# Altium PCB PCB1.PcbDoc
Units mil, origin at the board's own origin, x right, y up, seen from the top; angles counter-clockwise.
Board outline 6000 x 4000 mil, 2 copper layers (Top Layer, Bottom Layer); 112 components, 87 nets, 366 pads, 32 vias.
Unrouted connection lines stored in the file: 131.
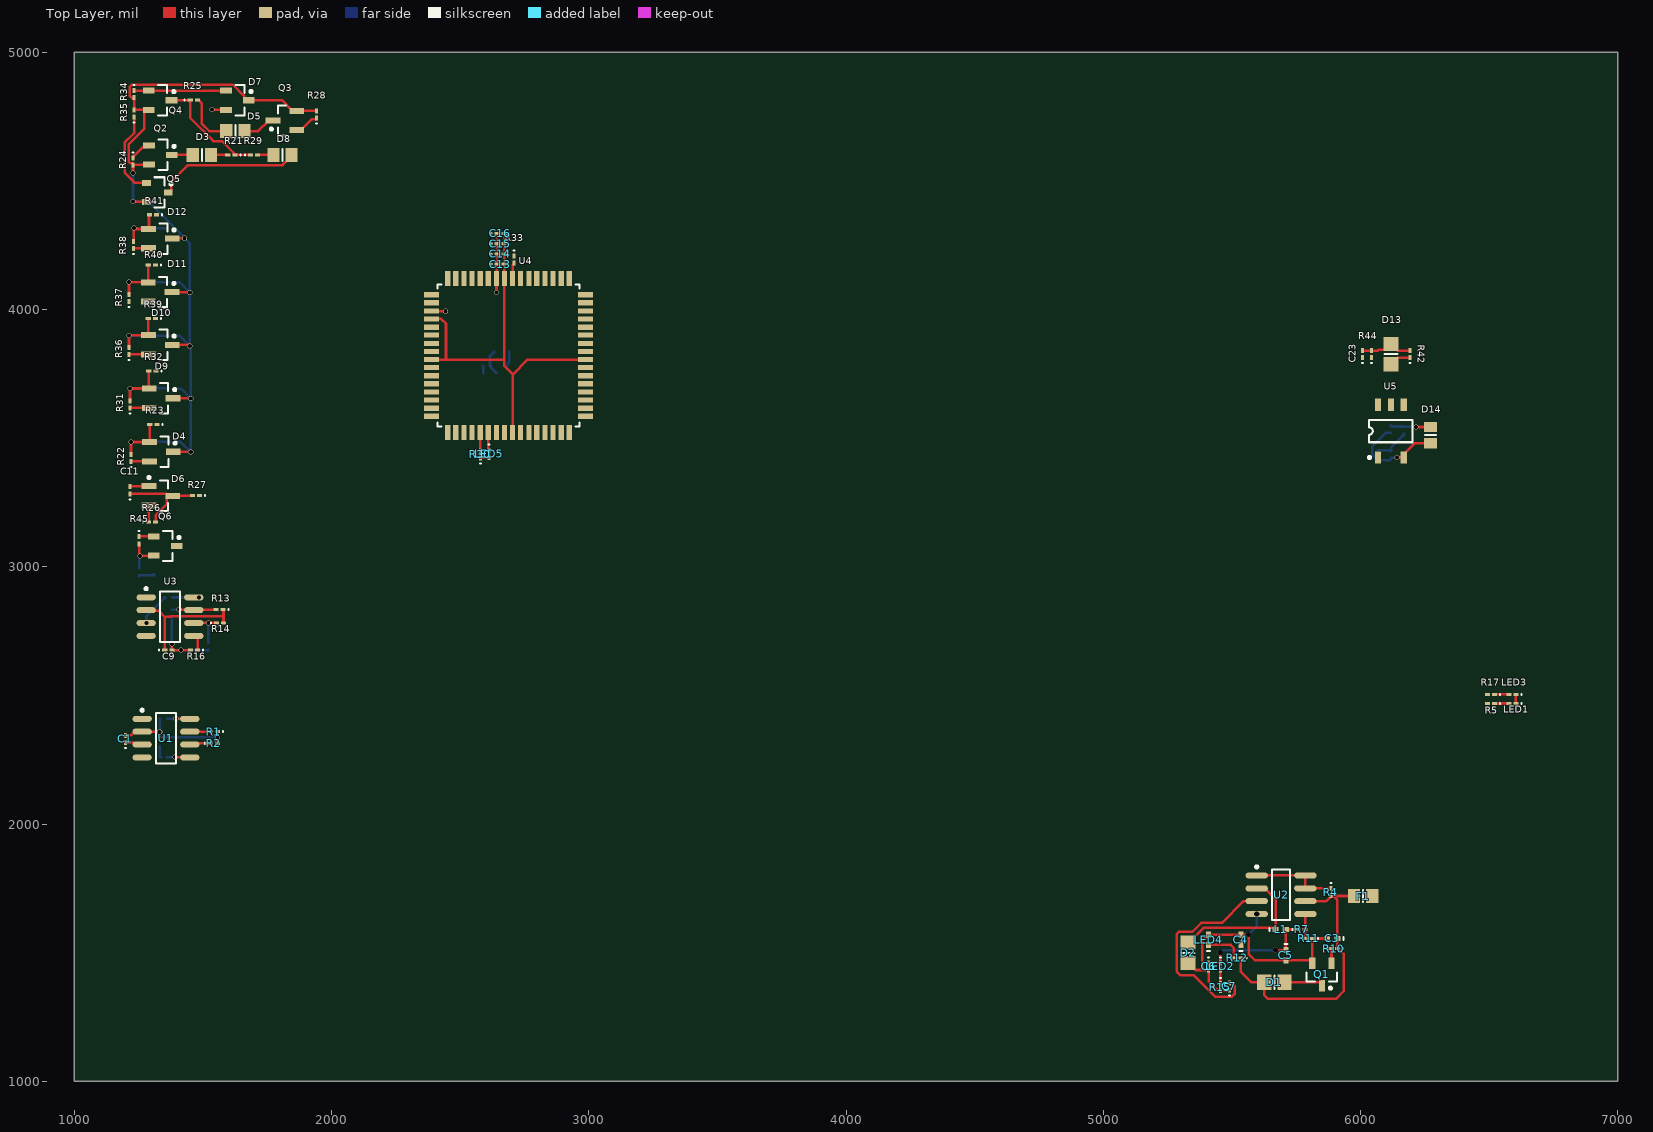
[diagram p0: Top Layer view]
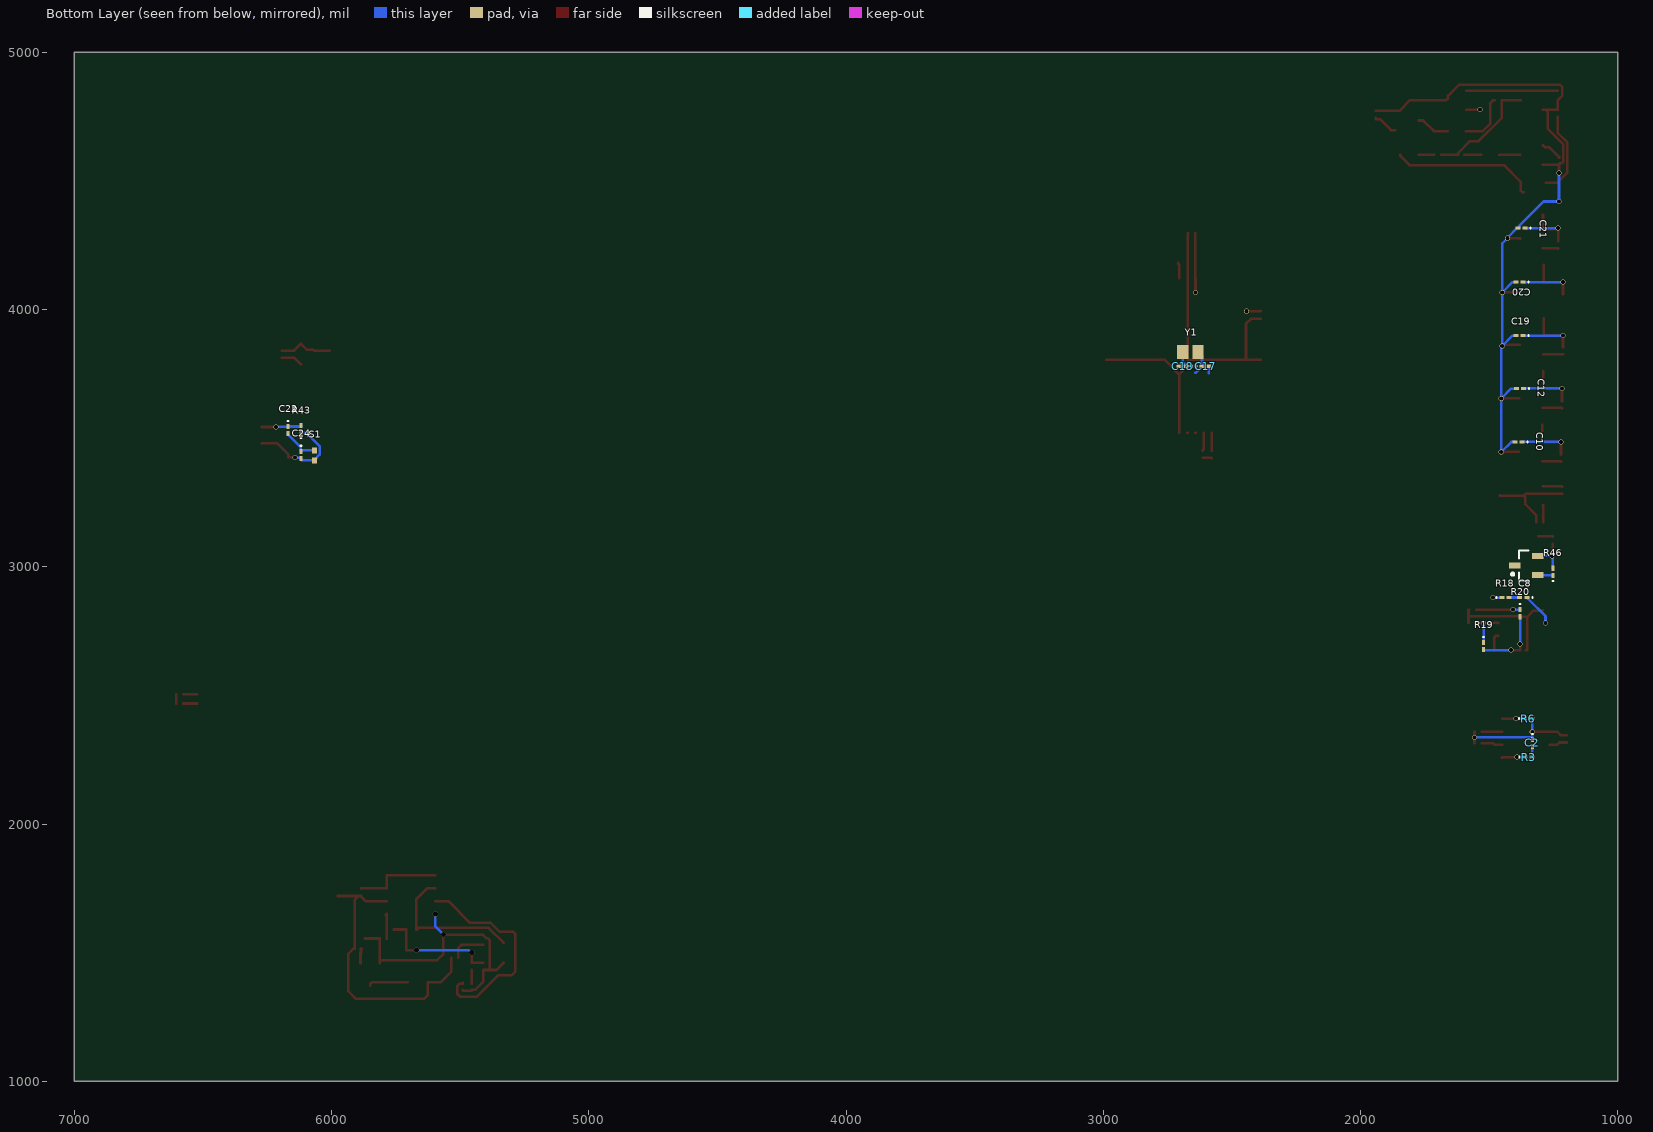
[diagram p1: Bottom Layer view, seen from below]

## Layer stack, top to bottom
Top Solder: solder mask 0.4, Solder Resist, Dk 3.5
Top Layer: signal copper 1.4
Dielectric 1: dielectric 12.6, FR-4, Dk 4.8
Bottom Layer: signal copper 1.4
Bottom Solder: solder mask 0.4, Solder Resist, Dk 3.5

## Board outline
1000,1000 7000,1000 7000,5000 1000,5000

## Design rules (kind name [scope] priority, off if disabled: settings)
Clearance [All] p1: gap=5.91 ignorepadtopadclearanceinfootprint=TRUE
PolygonConnect [All] p1: connectstyle=Relief reliefconductorwidth=10 reliefentries=4 polygonreliefangle="90 Angle" airgapwidth=10
RoutingVias [All] p1: holewidth=15.75 width=19.68 viastyle="Through Hole" minholewidth=7.87 minwidth=17.72 maxholewidth=39.37 maxwidth=50
SolderMaskExpansion [All] p1: expansion=4
Width [All] p1: maxlimit=10 minlimit=10 preferedwidth=10
30 further rules are at their usual default settings.

## Components (designator, comment, footprint, x,y, rotation, side; value= is the part's Value field where it differs from the comment)
C1 "100n" 0603 1198.8,2330.71 r90 top
C2 "4n7" 0603 1332.09,2314.96 r270 bottom value=100n
C3 "100n" 0402-A 5890.31,1555 r180 top
C4 "10u/16" 0402-A 5535,1549.68 r90 top value=470u/16
C5 "100u/6V3" 0402-A 5710,1490 r270 top value=470u/16
C6 "100n" 0603 5410,1446.22 r270 top
C7 "100p" 0603 5490,1368.78 r90 top value=100pF
C8 "100n" 0603 1367.21,2880.54 r0 bottom
C9 "4n7" 0603 1365.41,2675.65 r0 top value=100n
C10 "100n" 0603 1385.83,3485.59 r0 bottom
C11 "100n" 0603 1216.02,3297.46 r90 top
C12 "100n" 0603 1379.92,3693.43 r0 bottom
C13 "100n" 0603 2656.38,4176.16 r0 top
C14 "100n" 0603 2656.38,4215.97 r0 top
C15 "100n" 0603 2656.38,4255.78 r0 top
C16 "100n" 0603 2656.38,4295.59 r0 top
C17 "27p" 0603 2602.19,3779.53 r180 bottom value=100n
C18 "27p" 0603 2690.94,3779.53 r0 bottom value=100n
C19 "100n" 0603 1381.89,3898.33 r0 bottom
C20 "100n" 0603 1381.89,4106.3 r0 bottom
C21 "100n" 0603 1374.02,4316.41 r0 bottom
C22 "100n" 0603 6169.29,3531.5 r270 bottom
C23 "100n" 0603 6007.87,3826.77 r90 top
C24 "10n" 0603 6118.11,3435.04 r270 bottom value=100pF
D1 "P6SMB15A" 6-0805_M 5665,1385 r180 top
D2 "LL5817" 6-0805_M 5330,1499.37 r90 top
D3 "LL4148" 6-0805_N 1496.06,4601.06 r0 top
D4 "BAT54S" SOT23_M 1338.74,3447.2 r0 top
D5 "LL4148" 6-0805_N 1625.98,4693.42 r180 top
D6 "BAT54S" SOT-23B_M 1336.61,3275.78 r0 top
D7 "BAT54S" SOT23_N 1633.86,4813.66 r0 top
D8 "LL4148" 6-0805_N 1809.39,4601.06 r180 top
D9 "BAT54S" SOT23_M 1337.13,3655.05 r0 top
D10 "BAT54S" SOT23_M 1334.65,3862.89 r0 top
D11 "BAT54S" SOT23_M 1333.66,4067.95 r0 top
D12 "BAT54S" SOT23_M 1334.76,4275.76 r0 top
D13 "LL4148" 6-0805_M 6118.11,3826.77 r270 top
D14 "LL4448" 6-0805_L 6271.65,3511.81 r90 top
F1 "Fuse 1" 6-0805_N 6010.43,1720 r180 top
J1 "Header 7X2" HDR2X7 5962.2,6260.63 r90 top
J2 "Header 7X2" HDR2X7 3498.43,6265.87 r90 top
J3 "ZL201" HDR1X5 3228.43,6575.87 r90 top
J4 "MX-43045-0400" MHDR2X2 1218.43,6940.87 r0 top
J5 "MX-43045-0800" HDR2X4 2385.83,6126.77 r90 top
J6 "MX-43045-0600" HDR1X8 1917.32,5895.28 r90 top
J7 "MX-43045-0600" MHDR1X6 1254.8,6272.36 r90 top
L1 "DL22-330" 0402-A 5690,1590 r0 top value=100uH
LED1 "HCL-1904AYL" 0603 6590.55,2468.5 r180 top
LED2 "HCL-1903BG4" 0603 5455,1446.22 r270 top
LED3 "HCL-1906BR1" 0603 6590.55,2503.94 r180 top
LED4 "HCL-1904AYL" 0402-A 5410,1549.68 r90 top
LED5 "HCL-1906BR1" 0603 2612.37,3438.96 r270 top
Q1 "BSS138" SOT23_N 5850,1415 r270 top
Q2 "BSS123" SOT23_N 1334.65,4601.06 r0 top
Q3 "BSS123" SOT23_M 1819.07,4734.92 r180 top
Q4 "BSS123" SOT23_N 1333.66,4813.66 r0 top
Q5 "BSS123" SOT23_L 1322.83,4455.23 r0 top
Q6 "BSS123" SOT23_N 1353.54,3080.56 r0 top
Q7 "BSS123" SOT23_N 1355.31,3004.62 r0 bottom
R1 "CAN0001" 0603 1542.87,2358.98 r180 top
R2 "CAN0001" 0603 1542.87,2313.98 r0 top
R3 "nc" 0603 1345.87,2259.84 r180 bottom value=1K
R4 "1R" 0603 5885,1735 r270 top value=1K
R5 "4k7" 0603 6507.87,2468.5 r180 top value=1K
R6 "1k" 0603 1347.83,2409.45 r180 bottom value=1K
R7 "3k6 1%" 0603 5771.22,1590 r0 top value=1K
R8 "68" 0603 28890,1945 r0 top value=1K
R9 "68" 0603 29060,1945 r0 top value=1K
R10 "1M" 0603 5896.22,1515.56 r180 top value=1K
R11 "1k2 1%" 0603 5798.78,1555 r180 top value=1K
R12 "4k7" 0603 5521.22,1479.69 r180 top value=1K
R13 "CAN0001" 0603 1564.23,2833.13 r180 top
R14 "CAN0001" 0603 1566.2,2781.95 r0 top
R15 "1k8" 0603 5455,1366.22 r270 top value=1K
R16 "nc" 0603 1465.81,2675.65 r180 top value=1K
R17 "4k7" 0603 6507.87,2503.94 r180 top value=1K
R18 "1k" 0603 1436.28,2880.37 r180 bottom value=1K
R19 "68" 0603 1520.93,2691.4 r270 bottom value=1K
R20 "68" 0603 1379.19,2819.35 r270 bottom value=1K
R21 "10k" 0603 1610.24,4601.06 r180 top value=1K
R22 "10k" 0603 1220.47,3422.6 r90 top value=1K
R23 "1k" 0603 1307.09,3552.52 r180 top value=1K
R24 "4k7" 0603 1228.35,4575.47 r270 top value=1K
R25 "10k" 0603 1464.57,4813.66 r0 top value=1K
R26 "10k" 0603 1302.64,3173.25 r0 top value=1K
R27 "1k" 0603 1472.61,3277.78 r180 top value=1K
R28 "4k7" 0603 1940.94,4758.54 r90 top value=1K
R29 "10k" 0603 1698.99,4601.06 r0 top value=1K
R30 "1k8" 0603 2578.74,3437.01 r90 top value=1K
R31 "10k" 0603 1216.54,3630.44 r90 top value=1K
R32 "1k" 0603 1303.15,3760.36 r180 top value=1K
R33 "nc" 0603 2708.66,4194.88 r270 top value=1K
R34 "4k7" 0603 1232.28,4837.28 r270 top value=1K
R35 "4k7" 0603 1232.28,4762.48 r90 top value=1K
R36 "10k" 0603 1212.6,3839.27 r90 top value=1K
R37 "10k" 0603 1212.6,4045.28 r90 top value=1K
R38 "10k" 0603 1230.53,4251.17 r90 top value=1K
R39 "470" 0603 1301.18,3965.42 r180 top value=1K
R40 "1k" 0603 1301.18,4173.23 r180 top value=1K
R41 "1k" 0603 1305.81,4368.45 r180 top value=1K
R42 "4k7" 0603 6192.91,3826.77 r90 top value=1K
R43 "10k" 0603 6118.11,3535.43 r90 bottom value=1K
R44 "4k7" 0603 6043.31,3826.77 r90 top value=1K
R45 "4k7" 0603 1251.97,3103.04 r270 top value=1K
R46 "4k7" 0603 1252.42,2980.54 r90 bottom value=1K
S1 "DTSM32NB" 0402 6066.93,3433.07 r270 bottom
U1 "MCP2551-I/SN" SO8_L 1356.45,2333.85 r0 top
U2 "MC33063AD" SO8_N 5691.18,1725 r0 top
U3 "MCP2551-I/SN" SO8_L 1372.03,2806.24 r0 top
U4 "PIC30F5011" QFP80P1600X1600X120-64N 2687.99,3821.34 r270 top
U5 "MCP1320-46LT" SOP5(6) 6118.11,3527.33 r0 top
Y1 "10MHz" C0805 2661.42,3834.81 r180 bottom

## Footprints (in the part's own frame and the unit in brackets; to place one, negate y for a bottom-side part, rotate by r counter-clockwise, add the part's x,y. Pads: shape width x height; smd on the part's side, far side on the other; paste and mask are expansions set on the pad)
6-0805_L [mm] "Chip Resistor, Body 2.0x1.2mm, IPC High Density"
  rect 1x1.3 smd: 1(-0.8,0) 2(0.8,0)
  silkscreen extent 0,-0.55 0,0.55, body extent -1.07,-0.7 1.07,0.7, height 0.7
6-0805_M [mm] "Chip Resistor, Body 2.0x1.2mm, IPC Low Density"
  rect 1.4x1.5 smd: 1(-1,0) 2(1,0)
  silkscreen extent 0,-0.65 0,0.65, body extent -1.07,-0.7 1.07,0.7, height 0.7
6-0805_N [mm] "Chip Resistor, Body 2.0x1.2mm, IPC Medium Density"
  rect 1.2x1.4 smd: 1(-0.9,0) 2(0.9,0)
  silkscreen extent 0,-0.6 0,0.6, body extent -1.07,-0.7 1.07,0.7, height 0.7
0402 [mm] "Chip Capacitor, Body 1.0x0.5mm, IPC High Density"
  rect 0.6x0.5 smd: 1(-0.5,0) 2(0.5,0)
  body extent -0.55,-0.3 0.55,0.3, height 1.3
0402-A [mm] "Chip Inductor, Body 1.0x0.5mm, IPC High Density"
  rect 0.6x0.5 smd: 1(-0.5,0) 2(0.5,0)
  silkscreen extent -1.1,-0.15 -1.1,0.15, body extent -0.55,-0.3 0.55,0.3, height 0.55
0603 [mm] "Chip Inductor, Body 0.6x0.3mm, IPC High Density"
  rect 0.5x0.3 smd: 1(-0.35,0) 2(0.35,0)
  silkscreen extent -0.9,-0.05 -0.9,0.05, body extent -0.33,-0.18 0.33,0.18, height 0.55
C0805 [mm] "Chip Capacitor, Body 2.0x1.3mm, IPC High Density"
  rect 1.1x1.4 smd: 1(-0.75,0) 2(0.75,0)
  body extent -1.1,-0.72 1.1,0.72, height 1.4
HDR1X5 [mm] "Connector; Header; 5 Position"
  rect 1.5x1.5 hole 0.9: 1(0,0)
  round 1.5 hole 0.9: 2(2.54,0) 3(5.08,0) 4(7.62,0) 5(10.16,0)
  silkscreen extent -1.27,-1.27 11.43,1.27
HDR1X8 [mm] "Connector; Header; 8 Position"
  rect 1.5x1.5 hole 0.9: 1(0,0)
  round 1.5 hole 0.9: 2(2.54,0) 3(5.08,0) 4(7.62,0) 5(10.16,0) 6(12.7,0) 7(15.24,0) 8(17.78,0)
  silkscreen extent -1.27,-1.27 19.05,1.27
HDR2X4 [mm] "Connector; Header; 4x2 Position"
  rect 1.5x1.5 hole 0.9: 1(0,0)
  round 1.5 hole 0.9: 2(0,2.54) 3(2.54,0) 4(2.54,2.54) 5(5.08,0) 6(5.08,2.54) 7(7.62,0) 8(7.62,2.54)
  silkscreen extent -1.27,-1.27 8.89,3.81
HDR2X7 [mm] "Connector; Header; 7x2 Position"
  rect 1.5x1.5 hole 0.9: 1(0,0)
  round 1.5 hole 0.9: 2(0,2.54) 3(2.54,0) 4(2.54,2.54) 5(5.08,0) 6(5.08,2.54) 7(7.62,0) 8(7.62,2.54) 9(10.16,0) 10(10.16,2.54) 11(12.7,0) 12(12.7,2.54) 13(15.24,0) 14(15.24,2.54)
  silkscreen extent -1.27,-1.27 16.51,3.81
MHDR1X6 [mm] "Connector; Header; 6 Position"
  rect 1x1 hole 0.6: 1(0,0)
  round 1 hole 0.6: 2(1.27,0) 3(2.54,0) 4(3.81,0) 5(5.08,0) 6(6.35,0)
  silkscreen extent -0.9,-0.9 7.25,0.9
MHDR2X2 [mm] "Connector; Header; 2x2 Position"
  rect 1x1 hole 0.6: 1(0,0)
  round 1 hole 0.6: 2(0,1.27) 3(1.27,0) 4(1.27,1.27)
  silkscreen extent -0.9,-0.9 2.17,2.17
QFP80P1600X1600X120-64N [mil]
  rect 58x20 smd: 1(-300,236) 2(-300,205) 3(-300,173) 4(-300,142) 5(-300,110) 6(-300,79) 7(-300,47) 8(-300,16) 9(-300,-16) 10(-300,-47) 11(-300,-79) 12(-300,-110) 13(-300,-142) 14(-300,-173) 15(-300,-205) 16(-300,-236) 33(300,-236) 34(300,-205) 35(300,-173) 36(300,-142) 37(300,-110) 38(300,-79) 39(300,-47) 40(300,-16) 41(300,16) 42(300,47) 43(300,79) 44(300,110) 45(300,142) 46(300,173) 47(300,205) 48(300,236)
  rect 20x58 smd: 17(-236,-300) 18(-205,-300) 19(-173,-300) 20(-142,-300) 21(-110,-300) 22(-79,-300) 23(-47,-300) 24(-16,-300) 25(16,-300) 26(47,-300) 27(79,-300) 28(110,-300) 29(142,-300) 30(173,-300) 31(205,-300) 32(236,-300) 49(236,300) 50(205,300) 51(173,300) 52(142,300) 53(110,300) 54(79,300) 55(47,300) 56(16,300) 57(-16,300) 58(-47,300) 59(-79,300) 60(-110,300) 61(-142,300) 62(-173,300) 63(-205,300) 64(-236,300)
  silkscreen extent -276,-276 276,276
SO8_L [mm] "SOIC, 8-Leads, Body 4.9x3.9mm, Pitch 1.27mm, IPC High Density"
  oval 1.9x0.6 smd: 1(-2.35,1.905) 2(-2.35,0.635) 3(-2.35,-0.635) 4(-2.35,-1.905) 5(2.35,-1.905) 6(2.35,-0.635) 7(2.35,0.635) 8(2.35,1.905)
  silkscreen extent -2.47,-2.5 1,2.88, body extent -2,-2.5 2,2.5, height 1.75
SO8_N [mm] "SOIC, 8-Leads, Body 4.9x3.9mm, Pitch 1.27mm, IPC Medium Density"
  oval 2.2x0.6 smd: 1(-2.4,1.905) 2(-2.4,0.635) 3(-2.4,-0.635) 4(-2.4,-1.905) 5(2.4,-1.905) 6(2.4,-0.635) 7(2.4,0.635) 8(2.4,1.905)
  silkscreen extent -2.52,-2.5 0.9,2.88, body extent -2,-2.5 2,2.5, height 1.75
SOP5(6) [mm] "Small Outline; 6 Leads (1 Absent); Body Width 4.4 mm; Pitch 1.27 mm"
  rect 0.6x1.2 smd: 1(-1.27,-2.6) 3(1.27,-2.6) 4(1.27,2.6) 5(0,2.6) 6(-1.27,2.6)
  silkscreen extent -2.24,-2.72 2.15,1.1
SOT23_L [mm] "SOT23, 3-Leads, Body 2.9x1.3mm, Pitch 0.95mm, Lead Span 2.3mm - Reverse Pinning, IPC High Density"
  rect 0.85x0.6 smd: 1(1.075,0) 2(-1.075,-0.95) 3(-1.075,0.95)
  silkscreen extent -0.3,-1.5 1.48,1.5, body extent -0.7,-1.5 0.7,1.5, height 1.1
SOT23_M [mm] "SOT23, 3-Leads, Body 2.9x1.3mm, Pitch 0.95mm, Lead Span 2.3mm - Reverse Pinning, IPC Low Density"
  rect 1.45x0.6 smd: 1(1.175,0) 2(-1.175,-0.95) 3(-1.175,0.95)
  silkscreen extent -0.1,-1.5 1.48,1.5, body extent -0.7,-1.5 0.7,1.5, height 1.1
SOT23_N [mm] "SOT23, 3-Leads, Body 2.9x1.3mm, Pitch 0.95mm, Lead Span 2.3mm - Reverse Pinning, IPC Medium Density"
  rect 1.15x0.6 smd: 1(1.125,0) 2(-1.125,-0.95) 3(-1.125,0.95)
  silkscreen extent -0.2,-1.5 1.48,1.5, body extent -0.7,-1.5 0.7,1.5, height 1.1
SOT-23B_M [mm] "SOT23, 3-Leads, Body 2.9x1.3mm, Pitch 0.95mm, Lead Span 2.4mm, IPC Low Density"
  rect 1.45x0.6 smd: 1(-1.175,0.95) 2(-1.175,-0.95) 3(1.175,0)
  silkscreen extent -1.3,-1.5 0.7,1.92, body extent -0.7,-1.5 0.7,1.5, height 1.14

## Part data
C1 C2 C3 C6 C7 C8 C9 C10 C11 C12 C13 C14 C15 C16 C17 C18 C19 C20 C21 C22 C23 C24: library part Cap, "Capacitor", LatestRevisionDate=17-Jul-2002, LatestRevisionNote="Re-released for DXP Platform.", PackageReference=RAD-0.3, Published=8-Jun-2000, Publisher="Altium Limited"
C4 C5: library part "Cap Pol1", "Polarized Capacitor (Radial)", LatestRevisionDate=17-Jul-2002, LatestRevisionNote="Re-released for DXP Platform.", PackageReference=RB7.6-15, Published=8-Jun-2000, Publisher="Altium Limited"
D1: library part "D Zener", "Zener Diode", LatestRevisionDate=17-Jul-2002, LatestRevisionNote="Re-released for DXP Platform.", PackageReference=DIODE-0.7, Published=8-Jun-2000, Publisher="Altium Limited"
D2 D3 D5 D8 D13: library part 1N4148, "High Conductance Fast Diode", Code_JEDEC=DO-204-AH, ComponentLink1Description="Manufacturer Link", ComponentLink1URL=http://www.fairchildsemi.com/, ComponentLink2Description=Datasheet, ComponentLink2URL=http://www.fairchildsemi.com/ds/1N%2F1N4148.pdf, DatasheetDocument=1997, LatestRevisionDate=17-Jul-2002, LatestRevisionNote="Re-released for DXP Platform.", PackageReference=DO-35, Published=8-Jun-2000, Publisher="Altium Limited"
D4 D6 D7 D9 D10 D11 D12: "Schottky Barrier Double Diode", ComponentLink1Description="Manufacturer Link", ComponentLink1URL=http://www.semiconductors.philips.com/, ComponentLink2Description=Datasheet, ComponentLink2URL=http://www.semiconductors.philips.com/acrobat/datasheets/BAT54_SERIES_4.pdf, DatasheetVersion=4-Mar-2002, LatestRevisionDate=12-Dec-2006, LatestRevisionNote="IPC-7351 Footprint Added.", PackageDescription="3-Pin SOT-23 Package 0.95 mm Pitch, 2.3 mm Lead Span", PackageReference=SOT23, PackageVersion=May-1999, Published=17-Sep-2003, Publisher="Altium Limited"
D14: library part Diode, "Default Diode", PackageDocument=Sep-1996, Code_JEDEC=DO-214-AB, LatestRevisionDate=17-Jul-2002, LatestRevisionNote="Re-released for DXP Platform.", PackageReference=SMC, Published=8-Jun-2000, Publisher="Altium Limited"
F1: "Fuse", LatestRevisionDate=17-Jul-2002, LatestRevisionNote="Re-released for DXP Platform.", PackageReference=PIN-W2/E2.8, Published=8-Jun-2000, Publisher="Altium Limited"
J1 J2: "Header, 7-Pin, Dual row", LatestRevisionDate=17-Jul-2002, LatestRevisionNote="Re-released for DXP Platform.", Publisher="Altium Limited"
J3: library part CON5, "Connector"
J4: library part "Header 2X2", "Header, 2-Pin, Dual row", LatestRevisionDate=17-Jul-2002, LatestRevisionNote="Re-released for DXP Platform.", Publisher="Altium Limited"
J5: library part "Header 4X2A", "Header, 4-Pin, Dual row", LatestRevisionDate=17-Jul-2002, LatestRevisionNote="Re-released for DXP Platform.", Publisher="Altium Limited"
J6 J7: library part "Header 6", "Header, 6-Pin", LatestRevisionDate=17-Jul-2002, LatestRevisionNote="Re-released for DXP Platform.", Publisher="Altium Limited"
L1: library part "Inductor Iron", "Magnetic-Core Inductor", Published=24-Mar-1999, Publisher="Altium Limited", Revision="July-2002: Re-released for DXP Platform."
LED1 LED2 LED3 LED4 LED5: library part LED3, "Typical BLUE SiC LED", Published=8-Jun-2000, Publisher="Altium Limited", Revision 1="Jul-2002: Re-released for DXP Platform.", Revision 2="17-Dec-2003: PCB Footprint replaced."
Q1: "N-Channel Enhancement Mode Vertical DMOS FET", ComponentLink1Description="Manufacturer Link", ComponentLink1URL=http://www.zetex.com/, ComponentLink2Description=Datasheet, ComponentLink2URL=www.zetex.com/3.0/pdf/BSS138.pdf, DatasheetVersion=Mar-96, PackageDescription="SOT-23; 3 Leads; Body 3.1 x 2.5 mm, inc. leads (LxW max), Alternate Lead Configuration", PackageReference=SOT23, PackageVersion=1996, Published=17-Dec-2003, Publisher="Altium Limited"
Q2 Q3 Q4 Q5 Q6 Q7: "N-channel Enhancement Mode Vertical D-MOSFET", ComponentLink1Description="Manufacturer Link", ComponentLink1URL=http://www.semiconductors.philips.com/, ComponentLink2Description=Datasheet, ComponentLink2URL=http://www.semiconductors.philips.com/acrobat/datasheets/BSS123_3.pdf, DatasheetVersion=Apr-1995, LatestRevisionDate=12-Dec-2006, LatestRevisionNote="IPC-7351 Footprint Added.", PackageDescription="3-Pin SOT-23 Package 0.95 mm Pitch, 2.3 mm Lead Span", PackageReference=SOT23, PackageVersion=May-1999, Published=17-Sep-2003, Publisher="Altium Limited"
R1 R2 R13 R14: library part "Res Varistor", "Varistor (Voltage-Sensitive Resistor)", LatestRevisionDate=04-Mar-2005, LatestRevisionNote="PCB Footprint replaced.", PackageReference=6-0805, Published=24-Mar-1999, Publisher="Altium Limited"
R3 R4 R5 R6 R7 R8 R9 R10 R11 R12 R15 R16 R17 R18 R19 R20 R21 R22 R23 R24 R25 R26 R27 R28 R29 R30 R31 R32 R33 R34 R35 R36 R37 R38 R39 R40 R41 R42 R43 R44 R45 R46: library part Res2, "Resistor", LatestRevisionDate=17-Jul-2002, LatestRevisionNote="Re-released for DXP Platform.", PackageReference=AXIAL-0.4, Published=8-Jun-2000, Publisher="Altium Limited"
S1: library part PUSHB, "Switch PushButton"
U1 U3: "High Speed CAN Transceiver, 8-Pin Plastic SOIC, Industrial Grade", Code_JEDEC=MS-012, ComponentLink1Description="Manufacturer Link", ComponentLink1URL=http://www.microchip.com, ComponentLink2Description=Datasheet, ComponentLink2URL=http://ww1.microchip.com/downloads/en/DeviceDoc/21667d.pdf, DatasheetVersion=Nov-2003, LatestRevisionDate=13-Apr-2006, LatestRevisionNote="IPC-7351 Footprint Added.", PackageDescription="8-Pin Plastic Narrow Body Small Outline Integrated Circuit 1.27 mm Pitch", PackageReference=SOIC150-8, PackageVersion=Oct-2005, Published=6-Oct-2005, Publisher="Altium Limited"
U2: "DC-to-DC Converter Control Circuit", Code_IPC=SOIC127P600-8, Code_JEDEC=MS-012-AA, ComponentLink1Description="Manufacturer Link", ComponentLink1URL=http://www.onsemi.com/site/products/taxonomy/0,4438,503,00.html, ComponentLink2Description=Datasheet, ComponentLink2URL=http://www.onsemi.com/pub/Collateral/MC34063A-D.PDF, DatasheetVersion=1988, LatestRevisionDate=13-Apr-2006, LatestRevisionNote="IPC-7351 Footprint Added.", PackageDescription="8-Pin Small Outline Integrated Circuit 1.27 mm Pitch", PackageReference=751-02, Published=17-Jul-2002, Publisher="Altium Limited"
U4: "PIC30F5011 - Up"
U5: library part MCP1320
Y1: library part XTAL, "Crystal Oscillator", LatestRevisionDate=17-Jul-2002, LatestRevisionNote="Re-released for DXP Platform.", PackageReference=R38, Published=8-Jun-2000, Publisher="Altium Limited"

## Via types
v1: diameter 19.68, hole 15.75, Top Layer to Bottom Layer, 28 vias
v2: diameter 19.68, hole 19.68, Top Layer to Bottom Layer, 4 vias

## Nets (pads, with @x,y where several pads share a name; then routed paths per layer and width w, separated by ;. In a path a pad name is that pad's centre, name@x,y a point inside that pad or via, vN(x,y) a via of type N, cw(c..) or ccw(c..) an arc to the next point about the centre after c; other vN are vias at no path point)
+5V: C1.1 C5.1 C6.1 C8.1 C13.1 C14.1 C15.1 C16.1 C22.1 D4.2 D6.2 D7.2 D9.2 D10.2 D11.2 D12.2 D13.2 D14.2 J1.2 J2.2 J2.4 J2.6 J3.2 J4.2 L1.2 LED1.1 LED2.1 LED3.1 LED5.1 R7.1 R22.1 R26.1 R31.1 R36.1 R37.1 R38.1 R42.1 R43.2 U1.3 U3.3 U4.10 U4.19 U4.26 U4.38 U4.57 U5.5 | length 1752
  Top Layer w10: C1.1 1226.57,2316.93 1234.65,2308.85 U1.3 ; R36.1 D10.2 ; R31.1 R31.1 1217.44,3617.65 D9.2 ; R22.1 1220.47,3408.9 1221.38,3409.8 D4.2 ; R38.1 1231.01,4237.87 1289.99,4237.87 D12.2@1290.47,4238.36 ; R26.1 1288.86,3236.88 D6.2 ; v1(1535.43,4778.23) 1536.42,4777.24 1588.58,4777.24 D7.2 ; U4.19 2389.1,3993.23 v1(2443.78,3993.23) ; U4.38 2608.99,3458.1 2612.37,3454.72 LED5.1@2612.37,3450.79 ; v1(2641.73,4066.93) 2641.36,4067.3 2641.36,4120.97 U4.10 2641.8,4122.14 2641.8,4175.36 C13.1 C14.1 C15.1 C16.1 ; C6.1 LED2.1 v2(5455,1500) ; C5.1 5709.84,1509.84 5670.16,1509.84 v2(5670,1510) 5709.84,1510 5709.84,1589.84 L1.2 R7.1 ; D13.2 6120.08,3787.4 6145.67,3812.99 R42.1 ; v1(6216.54,3543.31) D14.2 ; LED1.1 LED3.1
  Bottom Layer w10: v1(1280.77,2781.95) 1280.77,2807.87 1348.59,2875.7 1348.59,2879.64 1349.5,2880.54 C8.1 ; v2(5455,1500) 5457.62,1500 5467.62,1510 v2(5670,1510) ; R43.2 6118.11,3546.18 6119.02,3545.28 C22.1 6169.29,3545.2 6170.2,3544.29 6215.55,3544.29 v1(6216.54,3543.31)
+12V: C3.1 C4.1 D1.2 F1.2 J5.5 R4.2 R10.1 R12.1 U2.6 | length 1125.6
  Top Layer w10: R12.1 5535,1425 5575,1385 D1.2 5625.63,1335.63 5641.26,1320 5905,1320 5935,1350 5935,1494.5 5913.94,1515.56 R10.1 C3.1 5910,1705 5895,1720 ; U2.6 5867.72,1700 R4.2@5885,1717.28 ; R4.2 5885,1720.91 5885.91,1720 5895,1720 ; F1.2 5895,1720
+12VPWR: F1.1 J6.3 J7.3
ADC0: J1.4 U4.16
ADC1: J1.6 U4.15
ADC2: J1.8 U4.14
ADC3: J1.10 U4.13
ADC4: J1.12 U4.12
ButD: C10.1 D4.3 R22.2 R23.2 U4.23 | length 341.5
  Top Layer w10: R22.2 v1(1220.47,3485.59) 1220.96,3485.1 1291.99,3485.1 D4.3 1293.31,3485.43 R23.2
  Bottom Layer w10: v1(1220.47,3485.59) C10.1
ButD_IN: J5.2 R23.1
ButN: C11.1 D6.3 R26.2 R27.2 U4.22 | length 370
  Top Layer w10: C11.1 1358.23,3283.68 D6.3@1366.14,3275.78 ; R26.2 1316.42,3200.1 1359.33,3243.02 1359.33,3268.97 D6.3@1366.14,3275.78 ; R27.2 1457.92,3276.87 1383.97,3276.87 D6.3 D6.3@1366.14,3275.78
ButN_IN: J5.3 R27.1
ButR: C12.1 D9.3 R31.2 R32.2 U4.21 | length 341.4
  Top Layer w10: R31.2 v1(1216.54,3693.43) 1217.03,3692.94 D9.3@1290.37,3692.94 ; R32.2 1289.37,3693.95 D9.3@1290.37,3692.94 ; D9.3 D9.3@1290.37,3692.94
  Bottom Layer w10: v1(1216.54,3693.43) C12.1
ButR_IN: J5.4 R32.1
CAN_BMS_RX: U4.58
CAN_BMS_TX: R17.2 U3.1 U4.59
CAN_BMSS_H: J7.1 R13.2 R20.1 U3.7 | length 172
  Top Layer w10: v1(1406.75,2833.13) 1407.7,2832.18 1465.49,2832.18 1465.53,2832.22 1549.55,2832.22 R13.2
  Bottom Layer w10: R20.1 v1(1406.75,2833.13)
CAN_BMSS_L: J7.2 R14.1 R19.1 U3.6 | length 164.9
  Top Layer w10: U3.6 1464.9,2781.59 1552.07,2781.59 R14.1
  Bottom Layer w10: R19.1 v1(1520.93,2781.95)
CAN_MUX_RX: U4.61
CAN_MUX_TX: R5.2 U1.1 U4.60
CAN_MUXED_H: J6.1 R1.2 R9.1 U1.7 | length 80.2
  Top Layer w10: U1.7 1449.03,2358.91 1529.03,2358.91 R1.2
CAN_MUXED_L: J6.2 R2.1 R8.1 U1.6 | length 82.3
  Top Layer w10: U1.6 1478.24,2308.85 1483.37,2313.98 R2.1
ChrgLED: Q6.3 R45.1 U4.29 | length 57.9
  Top Layer w10: R45.1 1251.97,3117.06 1252.87,3117.96 Q6.3
ChrgLED_OUT: J7.6 Q6.1
FluidHeater: Q7.3 R46.1 U4.30 | length 70
  Bottom Layer w10: R46.1@1251.97,2965.25 1251.97,2966.31 R46.1 ; R46.1@1252.42,2962.82 R46.1 ; Q7.3@1307.09,2971.15 Q7.3 1252.87,2967.21 R46.1
FluidHeater_OUT: J6.6 Q7.1
GND: C1.2 C2.1 C3.2 C4.2 C5.2 C6.2 C7.1 C8.2 C9.1 C10.2 C11.2 C12.2 C13.2 C14.2 C15.2 C16.2 C17.2 C18.2 C19.2 C20.2 C21.2 C22.2 C23.1 C24.1 D2.1 D4.1 D6.1 D7.1 D9.1 D10.1 D11.1 D12.1 J1.14 J2.12 J2.14 J3.3 J4.1 J5.1 LED4.2 Q1.2 Q2.2 Q3.2 Q4.2 Q5.2 Q6.2 Q7.2 R1.1 R2.2 R6.2 R11.1 R13.1 R14.2 R15.2 R18.2 R24.2 R28.2 R34.2 R35.2 R45.2 R46.2 S1.1 U1.2 U2.4 U3.2 U4.9 U4.20 U4.25 U4.41 U4.56 | length 7350.3
  Top Layer w10: C1.2@1198.19,2345.1 C1.2 1220.29,2344.49 1234.36,2358.56 1331.8,2358.56 v1(1332.09,2358.27) ; C11.2 1216.02,3311.31 1216.93,3312.21 1289.39,3312.21 D6.1 ; v1(1228.35,4419.96) 1229.41,4418.89 1279.44,4418.89 Q5.2 ; v1(1228.35,4530.2) R24.2 R24.2@1228.35,4562.76 ; R45.2 1251.97,3048.57 1255.91,3044.64 v1(1255.91,3042.02) 1256.48,3042.59 1308.68,3042.59 Q6.2 ; Q2.2 1229.25,4563.66 R24.2@1228.35,4562.76 ; Q4.2@1290.35,4776.26 Q4.2 Q4.2@1278.54,4776.26 ; U3.2@1292.3,2831.24 1294.35,2829.19 1328.01,2829.19 1351.63,2805.57 ; C9.1@1356.48,2674.74 1355.57,2675.65 C9.1 1351.63,2805.57 ; D12.1@1379.05,4275.76 1379.69,4276.4 1428.49,4276.4 v1(1429.13,4277.04) ; D11.1 1380.43,4067.44 1448.31,4067.44 v1(1448.82,4066.93) ; D10.1 v1@1448.82,3862.89 ; D9.1 1383.88,3654.56 1452.26,3654.56 v1(1452.76,3654.06) ; D4.1 1385.49,3446.71 1452.26,3446.71 v1(1452.76,3446.22) ; R2.2 v1(1556.65,2336.48) R1.1 ; R13.1 1579.07,2833.13 1579.98,2832.22 1579.98,2807.09 ; R14.2 1579.98,2807.09 ; R28.2 Q3.2 1848.59,4772.32 1807.25,4813.66 D7.1 1667.32,4813.66 1660.51,4820.47 1660.51,4829.99 1616.72,4873.78 1223.83,4873.78 1215.47,4865.42 1215.47,4831.22 1232.28,4814.4 R35.2 Q4.2@1278.54,4776.26 ; U4.25 2444.88,3805.34 ; U4.20 2426.43,3963.34 2444.88,3944.88 2444.88,3805.34 ; C16.2 2671.09,4295.59 2671.99,4294.69 U4.9 2671.99,3807.09 ; U4.41 2704.36,3521.7 2704.36,3570.5 2704.72,3570.87 2704.72,3748.03 ; U4.56 2762.03,3805.34 2704.72,3748.03 ; D2.1 5331.97,1460 5359.53,1432.44 5384.76,1432.44 ; C7.1 5490,1353.35 5489.09,1352.44 R15.2 5455,1354.41 5454.09,1355.32 5442.95,1355.32 5410,1388.26 C6.2 5384.76,1432.44 ; R11.1 C3.2 ; Q1.2 Q1.2@5812.58,1463.52 ; R11.1 Q1.2@5812.58,1463.52 ; R24.2@1228.35,4562.76 1228.35,4565.63 1225.47,4568.5 1217.92,4568.5 1211.54,4574.89 1211.54,4642.07 1271.73,4702.27 1271.73,4769.45 Q4.2@1278.54,4776.26 ; 1351.63,2805.57 1372.5,2805.57 1374.02,2807.09 1579.98,2807.09 ; 2444.88,3805.34 2670.24,3805.34 2671.99,3807.09 ; 2671.99,3807.09 2671.99,3780.76 2704.72,3748.03 ; 5384.76,1432.44 5384.76,1547.41 5394.01,1556.65 5399.25,1556.65 5410,1567.4 LED4.2 C4.2 5535.31,1569.69 5564.69,1569.69 v2(5565,1570) 5565,1495 5589.69,1470.31 C5.2 5805.79,1470.31 Q1.2@5812.58,1463.52
  Bottom Layer w10: v1(1228.35,4530.2) v1(1228.35,4419.96) 1287.85,4419.96 1382.95,4324.86 1382.95,4317.31 1383.86,4316.41 C21.2 1391.73,4316.41 1429.13,4279.01 v1(1429.13,4277.04) 1448.82,4257.35 v1(1448.82,4066.93) ; R46.2 1252.42,3035.91 1255.91,3039.4 v1(1255.91,3042.02) Q7.2 1304.21,3035.21 Q7.2@1293.31,3035.21 ; R6.2 1332.99,2409.45 1332.09,2408.54 v1(1332.09,2358.27) 1332.09,2337.91 1333.51,2336.48 v1(1556.65,2336.48) ; C8.2 1381.08,2880.46 1422.42,2880.46 R18.2 ; C12.2 1394.61,3692.53 1414.29,3692.53 v1(1452.76,3654.06) ; C19.2 1409.45,3898.33 v1(1448.82,3858.96) ; C20.2 1396.57,4105.39 1410.35,4105.39 v1(1448.82,4066.93) ; C10.2 1413.39,3485.59 v1(1452.76,3446.22) v1(1452.76,3654.06) ; C17.2 2588.58,3779.53 2589.48,3778.62 2589.48,3753.04 ; v2(5565,1570) 5596.69,1601.69 v2(5596.69,1650) ; S1.1 6117.2,3452.76 6118.11,3451.85 C24.1 6119.02,3449.72 6119.02,3463.5 6169.29,3513.78 C22.2 ; v1(1448.82,3858.96) v1(1448.82,4066.93) ; v1(1448.82,3858.96) 1448.82,3856.34 1452.76,3852.4 v1(1452.76,3654.06)
GPIOC13: J2.3 U4.47
GPIOC14: J2.1 U4.48
GPIOD0: J2.5 U4.46
GPIOD1: J1.13 U4.49
GPIOD2: J1.11 U4.50
GPIOD3: J1.9 U4.51
GPIOD4: J1.7 U4.52
GPIOD5: J1.5 U4.53
GPIOD6: J1.3 U4.54
GPIOD7: J1.1 U4.55
GPIOD8: J2.13 U4.42
GPIOD9: J2.11 U4.43
GPIOD10: J2.9 U4.44
GPIOD11: J2.7 U4.45
GROUND: D1.1 J6.4 J7.4 Q1.1 | length 155.9
  Top Layer w10: D1.1 5843.19,1385 5850,1378.19 Q1.1
ILUM: D7.3 J4.4 Q4.3 R34.1 | length 357.3
  Top Layer w10: R34.1 Q4.3 D7.3
IMP: C19.1 D10.3 R36.2 R39.2 U4.11 | length 342.1
  Top Layer w10: R36.2 v1(1212.6,3898.33) 1213.58,3899.31 1287.4,3899.31 R39.2
  Bottom Layer w10: v1(1212.6,3898.33) C19.1
IMP_IN: J4.3 R39.1
IsFHerror: C21.1 D12.3 R38.2 R41.2 U4.32 | length 296
  Top Layer w10: R38.2 1231.41,4265.83 1231.41,4315.53 v1(1232.28,4316.41) 1234.9,4316.41 1238.15,4313.16 1290.47,4313.16 1290.47,4367.54 1291.38,4368.45 R41.2
  Bottom Layer w10: v1(1232.28,4316.41) C21.1
IsFHerror_IN: J6.5 R41.1
IsHeating: C20.1 D11.3 R37.2 R40.2 U4.31 | length 345.9
  Top Layer w10: R37.2 v1(1212.6,4106.3) 1213.09,4105.81 1286.87,4105.81 1287.36,4105.31 D11.3 R40.2
  Bottom Layer w10: v1(1212.6,4106.3) C20.1
IsHeating_IN: J7.5 R40.1
LightD: Q2.3 R24.1 U4.24 | length 84.7
  Top Layer w10: R24.1 1228.35,4593.19 1266.81,4631.65 1283.54,4631.65 Q2.3
LightD_OUT: D3.1 J5.6 Q2.1 | length 81.7
  Top Layer w10: Q2.1 D3.1
LightN: Q3.3 R28.1 U4.27 | length 97.5
  Top Layer w10: Q3.3 1882.06,4697.52 1924.46,4739.92 1940.04,4739.92 1940.94,4740.83 R28.1
LightN_OUT: D5.1 J5.7 Q3.1 | length 128.6
  Top Layer w10: D5.1 1714.57,4693.42 1756.07,4734.92 Q3.1
LightR: Q5.3 R35.1 U4.28 | length 332.2
  Top Layer w10: R35.1 1232.28,4685.31 1195.63,4648.66 1195.63,4533.57 1236.57,4492.63 Q5.3
LightR_OUT: D8.1 J5.8 Q5.1 | length 562.1
  Top Layer w10: Q5.1 1370.08,4455.23 1376.89,4462.04 1376.89,4495.72 1442.87,4561.69 1809.39,4561.69 1844.82,4597.13 D8.1
MCLR: J3.1 R44.1 U4.7
NetC2_2: C2.2 R3.2 R8.2 R9.2 | length 46
  Bottom Layer w10: C2.2 1332.09,2260.75 1332.99,2259.84 1336.02,2259.84 R3.2@1336.93,2258.94
NetC7_2: C7.2 U2.3 | length 839.3
  Top Layer w10: C7.2 5490,1380.59 5490.91,1379.68 5502.05,1379.68 5510.75,1370.99 5510.75,1339.01 5499.49,1327.76 5436.15,1327.76 5351.31,1412.6 5299.32,1412.6 5285.63,1426.29 5285.63,1493.71 5285.63,1501.99 5285.63,1572.45 5294.32,1581.14 5346.31,1581.14 5381.03,1615.87 5460.87,1615.87 5545,1700 U2.3
NetC9_2: C9.2 R16.2 R19.2 R20.2 | length 309.5
  Top Layer w10: v1(1379.19,2699.27) C9.2 v1(1415.61,2675.65) R16.2
  Bottom Layer w10: v1(1379.19,2699.27) R20.2 ; v1(1415.61,2675.65) 1520.02,2675.65 1520.92,2676.55 R19.2
NetC17_1: C17.1 U4.39 Y1.2 | length 101.1
  Top Layer w10: U4.39 U4.39@2641.36,3520.97
  Bottom Layer w10: Y1.2 2615.97,3818.9 C17.1 2619.91,3779.53 2620.82,3778.62 2620.82,3774.69 2641.73,3753.77
NetC18_1: C18.1 U4.40 Y1.1 | length 66.6
  Top Layer w10: U4.40 U4.40@2672.61,3520.72
  Bottom Layer w10: C18.1@2675.08,3778.62 2675.99,3779.53 C18.1 2681.1,3779.53 2682.01,3780.43 2682.01,3787.98 2690.94,3796.92 Y1.1
NetC24_2: C24.2 D14.1 R43.1 S1.2 U5.3 | length 400.6
  Top Layer w10: v1(6141.73,3425.2) 6167.88,3425.2 U5.3 6168.11,3436.78 6211.65,3480.32 D14.1
  Bottom Layer w10: R43.1 6098.75,3521.65 6046.18,3469.08 6046.18,3436.1 6066.93,3415.35 S1.2 6114.17,3413.39 6118.11,3417.32 C24.2 6118.11,3422.44 6119.02,3423.34 6139.88,3423.34 v1(6141.73,3425.2)
NetD2_2: D2.2 L1.1 U2.2 | length 575.5
  Top Layer w10: D2.2 5331.97,1538.74 5389.25,1596.02 5662.32,1596.02 5668.35,1590 L1.1 5670.31,1707.87 5628.19,1750 U2.2
NetD3_2: D3.2 R21.2 | length 65
  Top Layer w10: D3.2 R21.2
NetD5_2: D5.2 R25.2 | length 208.7
  Top Layer w10: R25.2 1479.25,4812.76 1484.97,4812.76 1496.06,4801.67 1496.06,4721.98 1524.63,4693.42 D5.2
NetD8_2: D8.2 R29.2 | length 61.2
  Top Layer w10: R29.2 D8.2
NetLED1_2: LED1.2 R5.1 | length 55.1
  Top Layer w10: R5.1 LED1.2
NetLED2_2: LED2.2 R15.1 | length 52.4
  Top Layer w10: R15.1 LED2.2
NetLED3_2: LED3.2 R17.1 | length 55.1
  Top Layer w10: R17.1 LED3.2
NetLED4_1: LED4.1 R12.2 | length 140.5
  Top Layer w10: LED4.1 5495,1530 5507.44,1517.56 R12.2
NetLED5_2: LED5.2 R30.1 | length 35.1
  Top Layer w10: R30.1@2578.74,3421.26 2578.74,3422.32 2579.65,3423.23 LED5.2@2612.37,3423.23
NetQ1_3: Q1.3 R10.2 | length 59.5
  Top Layer w10: R10.2 5884.41,1515.56 5885.31,1514.66 5885.31,1499.02 5887.4,1496.93 Q1.3
NetQ4_1: Q4.1 R21.1 R25.1 R29.1 | length 440.1
  Top Layer w10: Q4.1 R25.1 1450.79,4744.76 1540.6,4654.95 1573.74,4654.95 1619.17,4609.52 1619.17,4601.97 1620.08,4601.06 R21.1 R29.1
NetR3_1: R3.1 U1.5 | length 91.8
  Top Layer w10: v1(1391.14,2259.84) 1391.64,2259.35 1448.47,2259.35 U1.5 U1.5@1450.43,2257.38
  Bottom Layer w10: R3.1 v1(1391.14,2259.84)
NetR4_1: R4.1 U2.1 U2.7 U2.8 | length 339
  Top Layer w10: U2.1 U2.8 U2.7 5884.09,1750 5885,1749.09 R4.1
NetR6_1: R6.1 U1.8 | length 113.2
  Top Layer w10: v1(1395.08,2409.45) 1395.38,2409.15 1448.67,2409.15 U1.8 U1.8@1423.38,2408.85
  Bottom Layer w10: R6.1 v1(1395.08,2409.45)
NetR7_2: R7.2 R11.2 U2.5 | length 101.4
  Top Layer w10: R11.2 R7.2 5785,1649.33 U2.5 U2.5@5790,1645.67
NetR16_1: R16.1 U3.5 | length 66.9
  Top Layer w10: U3.5 1473.29,2731.24 1479.59,2724.95 R16.1
NetR18_1: R18.1 U3.8 | length 35.4
  Bottom Layer w10: R18.1 v1(1485.49,2880.37)
NetR30_2: R30.2 U4.37 | length 70.9
  Top Layer w10: U4.37 2578.37,3520.96 2578.37,3451.16 R30.2
NetR33_2: R33.2 U4.8 | length 61.7
  Top Layer w10: U4.8 2703.99,4172.5 2708.66,4177.17 R33.2
PGC: J3.5 U4.17
PGD: J3.4 U4.18
RESET: C23.2 D13.1 R42.2 R44.2 U5.1 | length 206.2
  Top Layer w10: C23.2 R44.2 6067.38,3840.55 6070.41,3843.58 6095.55,3843.58 D13.1 6120.08,3866.14 6145.67,3840.55 R42.2
RX: J2.10 U4.34
TX: J2.8 U4.33
WDI: R33.1 U5.4
pads on no net: J6.7 J6.8 U1.4 U3.4 U4.1 U4.2 U4.3 U4.4 U4.5 U4.6 U4.35 U4.36 U4.62 U4.63 U4.64 U5.6

## Text inside footprints (layer, text, board x,y; h text height)
J1: Top Overlay "2" at 5882.2,6140.63 h50 r90; Top Overlay "1" at 5982.2,6140.63 h50 r90; Top Overlay "14" at 5882.2,6940.63 h50 r90; Top Overlay "13" at 5982.2,6940.63 h50 r90
J2: Top Overlay "2" at 3418.43,6145.87 h50 r90; Top Overlay "1" at 3518.43,6145.87 h50 r90; Top Overlay "14" at 3418.43,6945.87 h50 r90; Top Overlay "13" at 3518.43,6945.87 h50 r90
J4: Top Overlay "1" at 1155.43,6920.87 h39.37; Top Overlay "3" at 1316.85,6918.12 h39.37
J5: Top Overlay "2" at 2305.83,6026.77 h50 r90; Top Overlay "1" at 2405.83,6046.77 h50 r90; Top Overlay "7" at 2405.83,6486.77 h50 r90; Top Overlay "8" at 2305.83,6486.77 h50 r90